# Altium PCB CL-KB-V1.2.pcbdoc (part 2 of 3)
Units mil, origin at the board's own origin, x right, y up, seen from the top; angles counter-clockwise.
Board outline 3269.95 x 5989.25 mil, 2 copper layers (Top Layer, Bottom Layer); 76 components, 86 nets, 398 pads, 855 vias.
Unrouted connection lines stored in the file: 1.
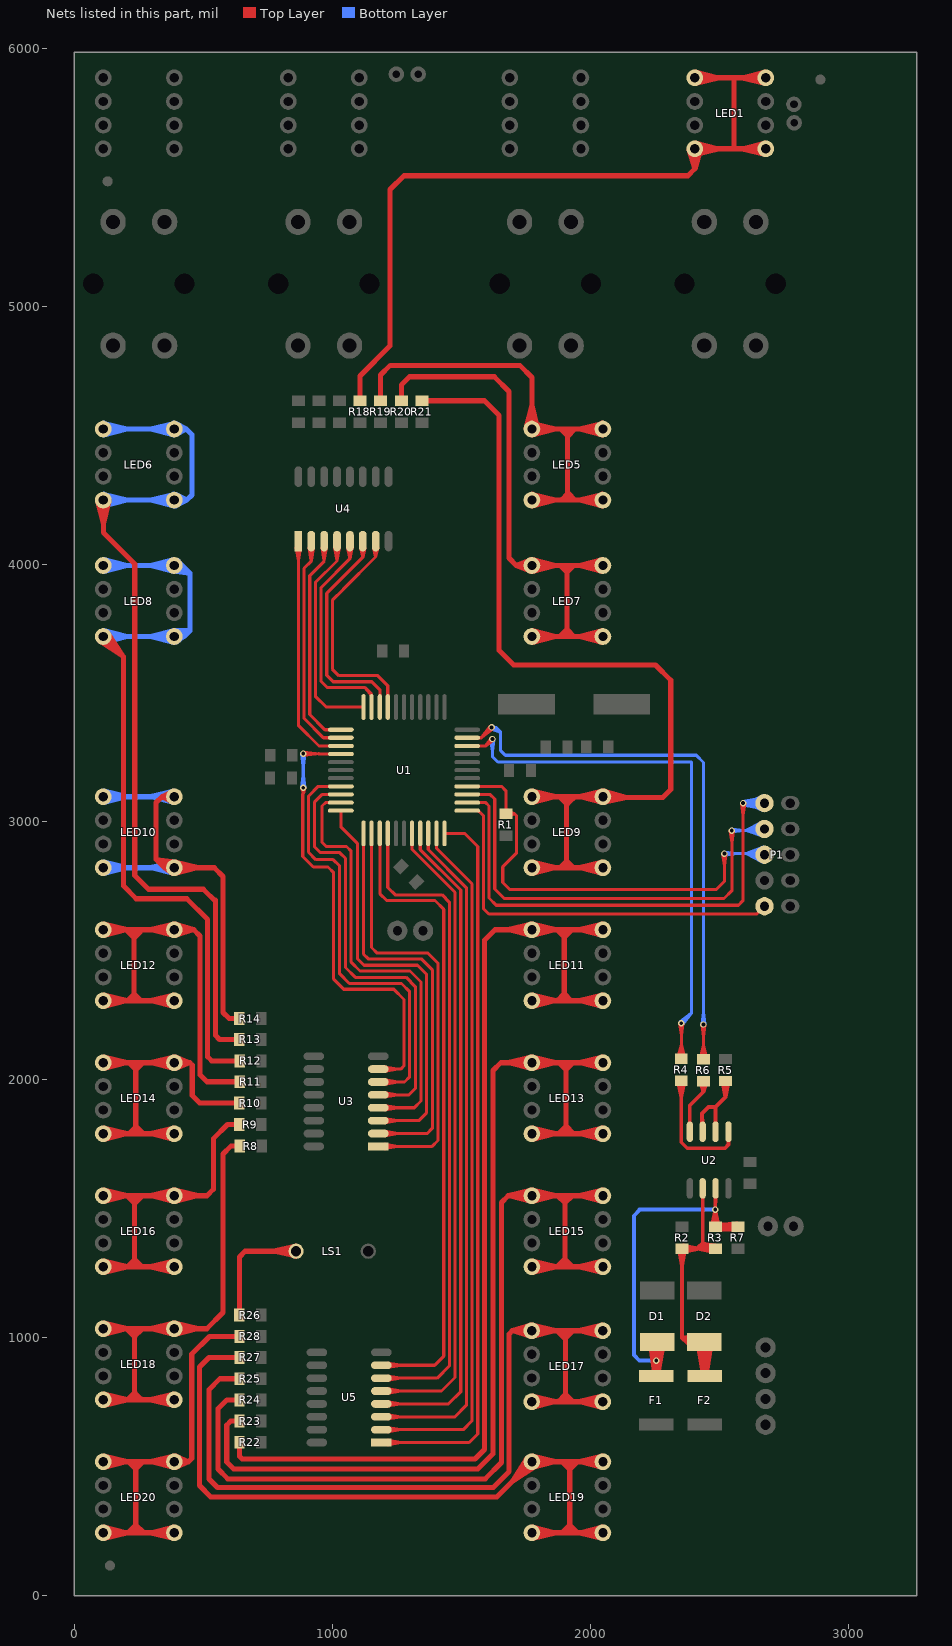
[diagram p2: the nets of this part, all layers, seen from the top]

## Via types
v1: diameter 25, hole 15, Top Layer to Bottom Layer, tented both sides, 855 vias

## Nets (pads, with @x,y where several pads share a name; then routed paths per layer and width w, separated by ;. In a path a pad name is that pad's centre, name@x,y a point inside that pad or via, vN(x,y) a via of type N, cw(c..) or ccw(c..) an arc to the next point about the centre after c; other vN are vias at no path point) (continued)
LEDK4: LED1.K R18.1 | length 4053.9
  Top Layer w20: R18.1@1106.15,4634.52 1106.15,4731.15 1223,4848 1223,5454 1277,5508 2379,5508 2405.48,5534.48 ; LED1.K@2383.22,5608.95 2405.48,5534.48 ; LED1.K@2405.48,5887.8 LED1.K@2681.07,5887.8 ; LED1.K@2408.22,5589.87 2497.98,5612.2 LED1.K@2408.22,5634.54 ; LED1.K@2408.22,5865.46 2497.98,5887.8 LED1.K@2408.22,5910.13 ; LED1.K@2427.74,5608.95 2405.48,5534.48 ; 2557,5612.2 2557,5887.8 ; LED1.K@2678.33,5589.87 2588.57,5612.2 ; LED1.K@2678.33,5634.54 2588.57,5612.2 ; LED1.K@2678.33,5865.46 2588.57,5887.8 LED1.K@2678.33,5910.13 ; 2405.48,5534.48 LED1.K@2405.48,5612.2 ; 2405.48,5534.48 LED1.K@2405.48,5612.2 ; LED1.K@2405.48,5612.2 LED1.K@2681.07,5612.2 2588.57,5612.2
LEDK5: LED5.K R19.1 | length 2998.3
  Top Layer w20: R19.1@1185.88,4634.52 1185.88,4734 1223.88,4772 1726,4772 1773.2,4724.8 LED5.K@1773.2,4524.8 LED5.K@2048.79,4524.8 1956.29,4524.8 ; LED5.K@1750.86,4527.54 1773.2,4617.3 LED5.K@1795.53,4527.54 ; LED5.K@1773.2,4249.21 LED5.K@2048.79,4249.21 1956.29,4249.21 ; LED5.K@1775.93,4226.88 1865.7,4249.21 LED5.K@1775.93,4271.54 ; LED5.K@1775.93,4502.47 1865.7,4524.8 LED5.K@1775.93,4547.14 ; 1886,4524.8 1911,4499.8 ; 1888.8,4250.21 1913.8,4275.21 ; 1912,4249.21 1912,4522.8 ; 1912.8,4498 1937.8,4523 ; 1914.8,4274.41 1939.8,4249.41 ; LED5.K@2046.05,4226.88 1956.29,4249.21 ; LED5.K@2046.05,4271.54 1956.29,4249.21 ; LED5.K@2046.05,4502.47 1956.29,4524.8 ; LED5.K@2046.05,4547.14 1956.29,4524.8
LEDK6: LED7.K R20.1 | length 3338.5
  Top Layer w20: R20.1@1266.58,4634.52 1266.58,4696 1298.58,4728 1627,4728 1684,4671 1684,4024 1712.72,3995.28 ; LED7.K@1769.01,3973.17 1712.72,3995.28 ; LED7.K@1769.01,4017.38 1712.72,3995.28 ; LED7.K@1773.2,3719.68 LED7.K@2048.79,3719.68 1956.29,3719.68 ; LED7.K@1773.2,3995.28 1712.72,3995.28 ; LED7.K@1775.93,3697.35 1865.7,3719.68 LED7.K@1775.93,3742.02 ; LED7.K@1775.93,3972.94 1865.7,3995.28 LED7.K@1775.93,4017.61 ; 1884,3994.8 1909,3969.8 ; 1884.2,3723 1909.2,3748 ; 1910,3719.68 1910,3995.28 ; 1910,3970 1935,3995 ; 1911,3745.2 1936,3720.2 ; LED7.K@2046.05,3697.35 1956.29,3719.68 ; LED7.K@2046.05,3742.02 1956.29,3719.68 ; LED7.K@2046.05,3972.94 1956.29,3995.28 ; LED7.K@2046.05,4017.61 1956.29,3995.28 ; 1712.72,3995.28 LED7.K@2048.79,3995.28 1956.29,3995.28
LEDK7: LED9.K R21.1 | length 4901.7
  Top Layer w20: R21.1@1346.31,4634.52 1589.48,4634.52 1646,4578 1646,3666 1703,3609 2253,3609 2312,3550 2312,3126 2281,3095 2051.82,3095 LED9.K@2048.79,3098.03 ; R21.1@1351.31,4634.52 1431.31,4634.52 ; LED9.K@1773.2,2822.44 LED9.K@2048.79,2822.44 1956.29,2822.44 ; LED9.K@1773.2,3098.03 LED9.K@2048.79,3098.03 ; LED9.K@1775.93,2800.11 1865.7,2822.44 LED9.K@1775.93,2844.77 ; LED9.K@1775.93,3075.7 1865.7,3098.03 LED9.K@1775.93,3120.36 ; 1882,3097.23 1907,3072.23 ; 1883.8,2823.44 1908.8,2848.44 ; 1908,2822.44 1908,3098.03 ; 1908.8,3067 1933.8,3092 ; 1909.8,2847.64 1934.8,2822.64 ; LED9.K@2046.05,2800.11 1956.29,2822.44 ; LED9.K@2046.05,2844.77 1956.29,2822.44 ; LED9.K@2046.05,3075.7 1956.29,3098.03 ; LED9.K@2046.05,3120.36 1956.29,3098.03 ; LED9.K@2050.79,3075.62 2141.4,3095 ; LED9.K@2052.25,3120.26 2141.4,3095 ; 1956.29,3098.03 LED9.K@2048.79,3098.03 ; LED9.K@2048.79,3098.03 2141.4,3095
LEDK8: LED18.K R8.1 | length 3022
  Top Layer w20: LED18.K@110.2,757.87 LED18.K@385.8,757.87 293.3,757.87 ; LED18.K@110.2,1033.46 511.46,1033.46 574,1096 574,1711 605,1742 ; LED18.K@112.94,735.54 202.7,757.87 LED18.K@112.94,780.21 ; LED18.K@112.94,1011.13 202.7,1033.46 LED18.K@112.94,1055.8 ; 205,1028.8 230,1003.8 ; 206.2,759.2 231.2,784.2 ; 229,1033.46 231,1031.46 231,757.87 ; 231.8,1004 256.8,1029 ; 232,785.2 257,760.2 ; LED18.K@383.06,735.54 293.3,757.87 ; LED18.K@383.06,780.21 293.3,757.87 ; LED18.K@383.06,1011.13 293.3,1033.46 ; LED18.K@383.06,1055.8 293.3,1033.46 ; LED18.K@385.8,1033.46 293.3,1033.46 ; LED18.K@388.53,1011.13 478.3,1033.46 LED18.K@388.53,1055.8 ; 605,1742 R8.1@640,1742 605,1742
LEDK9: LED16.K R9.1 | length 2607.3
  Top Layer w20: LED16.K@110.2,1274.02 LED16.K@385.8,1274.02 293.3,1274.02 ; LED16.K@110.2,1549.61 512,1549.61 537,1574.61 537,1771 591.54,1825.54 ; LED16.K@112.94,1251.68 202.7,1274.02 LED16.K@112.94,1296.35 ; LED16.K@112.94,1527.27 202.7,1549.61 LED16.K@112.94,1571.94 ; 205.8,1545.8 230.8,1520.8 ; 206.2,1276.2 231.2,1301.2 ; 227,1549.61 231,1545.61 231,1274.02 ; 231.8,1520 256.8,1545 ; 232,1302.2 257,1277.2 ; LED16.K@383.06,1251.68 293.3,1274.02 ; LED16.K@383.06,1296.35 293.3,1274.02 ; LED16.K@383.06,1527.27 293.3,1549.61 ; LED16.K@383.06,1571.94 293.3,1549.61 ; LED16.K@385.8,1549.61 293.3,1549.61 ; LED16.K@388.53,1527.27 478.3,1549.61 LED16.K@388.53,1571.94 ; 591.54,1825.54 R9.1@637.75,1825.54 591.54,1825.54
LEDK10: LED14.K R10.1 | length 2476.4
  Top Layer w20: LED14.K@110.2,1790.16 LED14.K@385.8,1790.16 293.3,1790.16 ; LED14.K@110.2,2065.75 445.25,2065.75 ; LED14.K@112.94,1767.82 202.7,1790.16 LED14.K@112.94,1812.49 ; LED14.K@112.94,2043.41 202.7,2065.75 LED14.K@112.94,2088.08 ; 210,2065.8 235,2040.8 ; 211.2,1792.2 236.2,1817.2 ; 236,1792.16 236,2065.75 ; 236.8,2039 261.8,2064 ; 237,1818.2 262,1793.2 ; LED14.K@383.06,1767.82 293.3,1790.16 ; LED14.K@383.06,1812.49 293.3,1790.16 ; LED14.K@383.06,2043.41 293.3,2065.75 ; LED14.K@383.06,2088.08 293.3,2065.75 ; LED14.K@385.8,2065.75 293.3,2065.75 ; LED14.K@390.05,2043.65 445.25,2065.75 ; LED14.K@390.05,2087.84 445.25,2065.75 ; 558,1909 R10.1@638,1909 484,1909 455,1938 455,2056 445.25,2065.75
LEDK11: LED12.K R11.1 | length 2934.1
  Top Layer w20: LED12.K@110.2,2306.3 LED12.K@385.8,2306.3 293.3,2306.3 ; LED12.K@110.2,2581.89 461.11,2581.89 ; LED12.K@112.94,2283.97 202.7,2306.3 LED12.K@112.94,2328.63 ; LED12.K@112.94,2559.56 202.7,2581.89 LED12.K@112.94,2604.22 ; 203.8,2575.8 228.8,2550.8 ; 204.2,2306.2 229.2,2331.2 ; 229,2306.3 229,2578.89 ; 229.8,2550 254.8,2575 ; 230,2332.2 255,2307.2 ; LED12.K@383.06,2283.97 293.3,2306.3 ; LED12.K@383.06,2328.63 293.3,2306.3 ; LED12.K@383.06,2559.56 293.3,2581.89 ; LED12.K@383.06,2604.22 293.3,2581.89 ; LED12.K@385.8,2581.89 293.3,2581.89 ; LED12.K@389.16,2559.64 461.11,2581.89 ; LED12.K@389.16,2604.14 461.11,2581.89 ; 559,1992 R11.1@639,1992 512,1992 485,2019 485,2558 461.11,2581.89
LEDK12: LED8.K R12.1 | length 4761.3
  Top Layer w20: LED8.K@96.07,3702.18 185.13,3644.76 LED8.K@127.71,3733.82 ; LED8.K@110.2,3719.68 189,3640.89 189,2751 238,2702 434,2702 515,2621 515,2089 531,2073 R12.1@639,2073 559,2073
  Bottom Layer w20: LED8.K@110.2,3719.68 423.68,3719.68 ; LED8.K@110.2,3995.28 415.72,3995.28 446,3965 ; LED8.K@112.94,3697.35 202.7,3719.68 LED8.K@112.94,3742.02 ; LED8.K@112.94,3972.94 202.7,3995.28 LED8.K@112.94,4017.61 ; LED8.K@379.18,3973.77 446,3965 ; LED8.K@381.79,3741.83 446,3742 ; LED8.K@383.06,3697.35 293.3,3719.68 ; LED8.K@383.06,3742.02 293.3,3719.68 ; LED8.K@383.06,3972.94 293.3,3995.28 ; LED8.K@383.06,4017.61 293.3,3995.28 ; LED8.K@397.19,3700.28 446,3742 ; LED8.K@399.12,4013.41 446,3965 ; 293.3,3719.68 LED8.K@385.8,3719.68 ; 293.3,3995.28 LED8.K@385.8,3995.28 446,3965 ; LED8.K@385.8,3719.68 423.68,3719.68 ; LED8.K@385.8,3719.68 446,3742 ; 423.68,3719.68 392.48,3698.2 423.68,3719.68 ; 423.68,3719.68 392.48,3741.17 423.68,3719.68 ; 423.68,3719.68 446,3742 ; 446,3742 446,3965
LEDK13: LED6.K R13.1 | length 4893.7
  Top Layer w20: LED6.K@87.87,4246.48 110.2,4156.71 ; LED6.K@132.54,4246.48 110.2,4156.71 ; 545,2692 498,2739 285,2739 232,2792 232,4001 110.2,4122.8 LED6.K@110.2,4249.21 110.2,4156.71 ; 545,2696 545,2172 561,2156 ; 561,2156 R13.1@638,2156 561,2156
  Bottom Layer w20: LED6.K@110.2,4249.21 434.21,4249.21 ; LED6.K@110.2,4524.8 432.2,4524.8 ; LED6.K@112.94,4226.88 202.7,4249.21 LED6.K@112.94,4271.54 ; LED6.K@112.94,4502.47 202.7,4524.8 LED6.K@112.94,4547.14 ; LED6.K@383.06,4226.88 293.3,4249.21 ; LED6.K@383.06,4271.54 293.3,4249.21 ; LED6.K@383.06,4502.47 293.3,4524.8 ; LED6.K@383.06,4547.14 293.3,4524.8 ; LED6.K@385.8,4249.21 293.3,4249.21 ; LED6.K@385.8,4524.8 293.3,4524.8 ; LED6.K@391.02,4227.33 434.21,4249.21 ; LED6.K@391.02,4271.1 434.21,4249.21 ; LED6.K@391.25,4502.97 432.2,4524.8 ; LED6.K@391.25,4546.63 432.2,4524.8 ; 432.2,4524.8 454,4503 454,4269 434.21,4249.21
LEDK14: LED10.K R14.1 | length 3494.7
  Top Layer w20: LED10.K@373.54,2803.57 315,2855 ; LED10.K@380.5,3076.16 338.03,3098.03 ; LED10.K@380.5,3119.9 338.03,3098.03 ; LED10.K@388.53,2800.11 478.3,2822.44 LED10.K@388.53,2844.77 ; LED10.K@392.15,2844.03 315,2855 ; 315,2855 LED10.K@385.8,2822.44 ; 315,2855 347.56,2822.44 ; 315,2855 315,3075 338.03,3098.03 ; 338.03,3098.03 LED10.K@385.8,3098.03 338.03,3098.03 ; 347.56,2822.44 LED10.K@385.8,2822.44 ; 347.56,2822.44 379.18,2843.94 347.56,2822.44 ; 347.56,2822.44 379.18,2800.94 347.56,2822.44 ; 347.56,2822.44 LED10.K@385.8,2822.44 ; 347.56,2822.44 540.56,2822.44 575,2788 575,2261 599,2237 ; 599,2237 R14.1@638,2237 599,2237
  Bottom Layer w20: LED10.K@110.2,2822.44 LED10.K@385.8,2822.44 293.3,2822.44 ; LED10.K@110.2,3098.03 LED10.K@385.8,3098.03 293.3,3098.03 ; LED10.K@112.94,2800.11 202.7,2822.44 LED10.K@112.94,2844.77 ; LED10.K@112.94,3075.7 202.7,3098.03 LED10.K@112.94,3120.36 ; LED10.K@383.06,2800.11 293.3,2822.44 ; LED10.K@383.06,2844.77 293.3,2822.44 ; LED10.K@383.06,3075.7 293.3,3098.03 ; LED10.K@383.06,3120.36 293.3,3098.03
LEDK15: LED11.K R22.1 | length 5421.4
  Top Layer w20: R22.1@638.45,588.17 638.45,538.55 ; R22.1@638.45,593.17 638.45,538.55 ; LED11.K@1770.43,2559.56 1680.7,2582 ; LED11.K@1770.49,2604.23 1680.7,2582 ; LED11.K@1773.2,2306.3 LED11.K@2048.79,2306.3 1956.29,2306.3 ; LED11.K@1775.93,2283.97 1865.7,2306.3 LED11.K@1775.93,2328.63 ; LED11.K@1775.93,2559.56 1865.7,2581.89 LED11.K@1775.93,2604.22 ; 1873,2580.8 1898,2555.8 ; 1873.2,2308 1898.2,2333 ; 1899,2307.3 1899,2581.89 ; 1899.2,2332.2 1924.2,2307.2 ; 1899.8,2554 1924.8,2579 ; LED11.K@2046.05,2283.97 1956.29,2306.3 ; LED11.K@2046.05,2328.63 1956.29,2306.3 ; LED11.K@2046.05,2559.56 1956.29,2581.89 ; LED11.K@2046.05,2604.22 1956.29,2581.89 ; 638.45,538.55 649,528 1552,528 1589,565 1589,2541 1630,2582 1773.09,2582 LED11.K@1773.2,2581.89 ; 1680.7,2582 LED11.K@1773.2,2581.89 ; LED11.K@1773.2,2581.89 LED11.K@2048.79,2581.89 1956.29,2581.89
LEDK16: LED13.K R23.1 | length 5120.9
  Top Layer w20: LED13.K@1770.46,2043.41 1680.7,2065.75 ; LED13.K@1770.46,2088.08 1680.7,2065.75 ; LED13.K@1773.2,1790.16 LED13.K@2048.79,1790.16 1956.29,1790.16 ; LED13.K@1773.2,2065.75 1680.7,2065.75 ; LED13.K@1775.93,1767.82 1865.7,1790.16 LED13.K@1775.93,1812.49 ; LED13.K@1775.93,2043.41 1865.7,2065.75 LED13.K@1775.93,2088.08 ; 1880,2064.8 1905,2039.8 ; 1880.2,1793 1905.2,1818 ; 1906,1792.16 1906,2065.75 ; 1906.8,2039 1931.8,2064 ; 1907,1818.2 1932,1793.2 ; LED13.K@2046.05,1767.82 1956.29,1790.16 ; LED13.K@2046.05,1812.49 1956.29,1790.16 ; LED13.K@2046.05,2043.41 1956.29,2065.75 ; LED13.K@2046.05,2088.08 1956.29,2065.75 ; 604.87,674.87 R23.1@638.45,674.87 604.87,674.87 ; 604.87,674.87 589,659 589,516 616,489 1563,489 1622,548 1622,2035 1652.75,2065.75 LED13.K@2048.79,2065.75 1956.29,2065.75
LEDK17: LED15.K R24.1 | length 4826.7
  Top Layer w20: LED15.K@1770.43,1527.28 1681.61,1549.61 ; LED15.K@1770.43,1571.94 1681.61,1549.61 ; LED15.K@1773.2,1274.02 LED15.K@2048.79,1274.02 1956.29,1274.02 ; LED15.K@1773.2,1549.61 1681.61,1549.61 ; LED15.K@1775.93,1251.68 1865.7,1274.02 LED15.K@1775.93,1296.35 ; LED15.K@1775.93,1527.27 1865.7,1549.61 LED15.K@1775.93,1571.94 ; 1876.2,1279 1901.2,1304 ; 1877,1547 1902,1522 1927,1547 ; 1902,1276.02 1902,1549.61 ; 1902.2,1303.2 1927.2,1278.2 ; LED15.K@2046.05,1251.68 1956.29,1274.02 ; LED15.K@2046.05,1296.35 1956.29,1274.02 ; LED15.K@2046.05,1527.27 1956.29,1549.61 ; LED15.K@2046.05,1571.94 1956.29,1549.61 ; 589.54,757.55 R24.1@638.45,757.55 589.54,757.55 ; 589.54,757.55 555,723 555,489 593,451 1592,451 1655,514 1655,1523 1681.61,1549.61 ; 1681.61,1549.61 LED15.K@2048.79,1549.61 1956.29,1549.61
LEDK18: LED17.K R25.1 | length 4507.5
  Top Layer w20: LED17.K@1768.83,1003.55 1697.2,1025.8 ; LED17.K@1768.83,1048.04 1697.2,1025.8 ; LED17.K@1772.2,750.2 LED17.K@2047.8,750.2 1955.3,750.2 ; LED17.K@1772.2,1025.8 1697.2,1025.8 ; LED17.K@1774.94,727.87 1864.7,750.2 LED17.K@1774.94,772.54 ; LED17.K@1774.94,1003.46 1864.7,1025.8 LED17.K@1774.94,1048.13 ; 1877,1019.8 1902,994.8 ; 1877.2,752 1902.2,777 ; 1902.8,995.8 1927.8,1020.8 ; 1903,751.2 1903,1025.8 ; 1904,778.2 1929,753.2 ; LED17.K@2045.06,727.87 1955.3,750.2 ; LED17.K@2045.06,772.54 1955.3,750.2 ; LED17.K@2045.06,1003.46 1955.3,1025.8 ; LED17.K@2045.06,1048.13 1955.3,1025.8 ; 562.24,839.24 R25.1@638.45,839.24 562.24,839.24 ; 562.24,839.24 520,797 520,450 553,417 1623,417 1685,479 1685,1013.59 1697.2,1025.8 ; 1697.2,1025.8 LED17.K@2047.8,1025.8 1955.3,1025.8
LEDK19: LED19.K R27.1 | length 4286.7
  Top Layer w20: 558.45,921.92 R27.1@638.45,921.92 520,921.92 483,884.92 483,425 527,381 1636.87,381 LED19.K@1773.2,517.32 ; LED19.K@1755.69,531.45 1698.27,442.4 ; LED19.K@1773.2,241.73 LED19.K@2048.79,241.73 1956.29,241.73 ; LED19.K@1775.93,219.4 1865.7,241.73 LED19.K@1775.93,264.06 ; LED19.K@1775.93,494.99 1865.7,517.32 LED19.K@1775.93,539.66 ; LED19.K@1787.33,499.81 1698.27,442.4 ; 1894,513.8 1919,488.8 ; 1894.2,245 1919.2,270 ; 1920,241.73 1920,517.32 ; 1920.8,489 1945.8,514 ; 1921,270.2 1946,245.2 ; LED19.K@2046.05,219.4 1956.29,241.73 ; LED19.K@2046.05,264.06 1956.29,241.73 ; LED19.K@2046.05,494.99 1956.29,517.32 ; LED19.K@2046.05,539.66 1956.29,517.32 ; 1698.27,442.4 LED19.K@1773.2,517.32 ; LED19.K@1773.2,517.32 LED19.K@2048.79,517.32 1956.29,517.32
LEDK20: LED20.K R28.1 | length 2774
  Top Layer w20: LED20.K@110.2,241.73 LED20.K@385.8,241.73 293.3,241.73 ; LED20.K@110.2,517.32 440.32,517.32 ; LED20.K@112.94,219.4 202.7,241.73 LED20.K@112.94,264.06 ; LED20.K@112.94,494.99 202.7,517.32 LED20.K@112.94,539.66 ; 210,515.8 235,490.8 ; 210.2,246 235.2,271 ; 236,241.73 236,516.32 237,517.32 ; 236.8,491 261.8,516 ; 237,271.2 262,246.2 ; LED20.K@383.06,219.4 293.3,241.73 ; LED20.K@383.06,264.06 293.3,241.73 ; LED20.K@383.06,494.99 293.3,517.32 ; LED20.K@383.06,539.66 293.3,517.32 ; LED20.K@385.8,517.32 293.3,517.32 ; LED20.K@390.44,495.31 440.32,517.32 ; LED20.K@390.44,539.34 440.32,517.32 ; 558.45,1003.61 R28.1@638.45,1003.61 521.61,1003.61 453,935 453,530 440.32,517.32
LOUT1: U1.35 U3.1 | length 1863.8
  Top Layer w12: 1151,2870 U1.35@1151,2914 ; U1.35@1151,2967 1151,2513 1173,2491 1370,2491 1409,2452 1409,1764 1386,1741 U3.1@1177,1741 ; U3.1@1202,1741 1253,1741 ; U3.1@1202.79,1732.04 1253,1741 ; U3.1@1202.79,1749.96 1253,1741
LOUT2: U1.34 U3.2 | length 1791.6
  Top Layer w12: 1120,2870 U1.34@1120,2914 ; U1.34@1120,2956 1120,2487 1138,2469 1344,2469 1387,2426 1387,1811 1367,1791 U3.2@1177,1791 ; U3.2@1202,1791 1253,1791 ; U3.2@1202.79,1782.04 1253,1791 ; U3.2@1202.79,1799.96 1253,1791
LOUT3: U1.33 U3.3 | length 1829
  Top Layer w12: 1032,3000 U1.33@1032,3044 1032,2981 1096,2917 1096,2470 1122,2444 1329,2444 1365,2408 1365,1872 1334,1841 U3.3@1177,1841 ; U3.3@1202,1841 1253,1841 ; U3.3@1202.79,1832.04 1253,1841 ; U3.3@1202.79,1849.96 1253,1841
LOUT4: U1.32 U3.4 | length 1890.1
  Top Layer w12: U1.32@990,3075 972,3075 ; U1.32@1032,3075 972,3075 ; U3.4@1177,1891 1317,1891 1343,1917 1343,2379 1300,2422 1106,2422 1072,2456 1072,2887 1054,2905 975,2905 959,2921 959,3062 972,3075 ; U3.4@1202,1891 1253,1891 ; U3.4@1202.79,1882.04 1253,1891 ; U3.4@1202.79,1899.96 1253,1891
LOUT5: U1.31 U3.5 | length 1884.9
  Top Layer w12: U1.31@990,3107 960,3107 ; U1.31@1032,3107 960,3107 ; U3.5@1177,1941 1296,1941 1321,1966 1321,2361 1285,2397 1088,2397 1050,2435 1050,2859 1028,2881 953,2881 929,2905 929,3076 960,3107 ; U3.5@1202,1941 1253,1941 ; U3.5@1202.79,1932.04 1253,1941 ; U3.5@1202.79,1949.96 1253,1941
LOUT6: U1.30 U3.6 | length 1878.4
  Top Layer w12: 946,3138 U1.30@990,3138 ; U1.30@1032,3138 944,3138 906,3100 906,2883 935,2854 1002,2854 1027,2829 1027,2411 1065,2373 1267,2373 1299,2341 1299,2011 1279,1991 U3.6@1177,1991 ; U3.6@1202,1991 1253,1991 ; U3.6@1202.79,1982.04 1253,1991 ; U3.6@1202.79,1999.96 1253,1991
LOUT7: U1.26 U3.7 | length 2375.2
  Top Layer w12: v1@879.57,3132.03 886,3111.11 ; v1(886,3265) U1.26@1032,3264 ; v1@886.39,3258.51 934.5,3264.67 v1@886.48,3271.48 ; v1@892.43,3132.03 886,3111.11 ; 946,3264.59 U1.26@990,3264 ; U3.7@1177,2041 1264,2041 1277,2054 1277,2311 1237,2351 1043,2351 1004,2390 1004,2803 982,2825 925,2825 884,2866 884,3109.11 886,3111.11 ; U3.7@1202,2041 1253,2041 ; U3.7@1202.79,2032.04 1253,2041 ; U3.7@1202.79,2049.96 1253,2041 ; 886,3111.11 v1(886,3133) 886,3111.11
  Bottom Layer w12: v1@879.51,3133.44 886,3181.5 v1@892.49,3133.44 ; v1@879.51,3264.56 886,3216.5 ; v1(886,3133) v1(886,3265) 886,3216.5 ; v1@892.49,3264.56 886,3216.5
LOUT8: U1.25 U4.1 | length 1109
  Top Layer w12: U4.1@858.04,4064.21 867,4014 ; U4.1@867,4065 867,4014 ; U4.1@867,4090 867,3375.11 947.11,3295 ; U4.1@875.96,4064.21 867,4014 ; U1.25@990,3295 947.11,3295 ; U1.25@1032,3295 947.11,3295
LOUT9: U1.24 U4.2 | length 1052.5
  Top Layer w12: U4.2@908.04,4064.21 917,4014 ; U4.2@917,4065 917,4014 ; U4.2@917,4090 917,4012 889,3984 889,3402.11 964.11,3327 ; U4.2@925.96,4064.21 917,4014 ; U1.24@990,3327 964.11,3327 ; U1.24@1032,3327 964.11,3327
LOUT10: U1.23 U4.3 | length 1021.6
  Top Layer w12: U4.3@958.04,4064.21 967,4014 ; U4.3@967,4065 967,4014 ; U4.3@967,4097 967,4012 911,3956 911,3417 970,3358 ; U4.3@975.96,4064.21 967,4014 ; U1.23@990,3358 970,3358 ; U1.23@1032,3358 970,3358
LOUT11: U1.22 U4.4 | length 1038.2
  Top Layer w12: U4.4@1008.04,4064.21 1017,4014 ; U4.4@1017,4065 1017,4014 ; U4.4@1017,4090 1017,4013 933,3929 933,3488 975,3446 U1.22@1120,3446 1076,3446 ; U4.4@1025.96,4064.21 1017,4014
LOUT12: U1.21 U4.5 | length 1048
  Top Layer w12: U4.5@1058.05,4064.08 1067,4021 ; U4.5@1067,4065 1067,4021 ; U4.5@1067,4090 1067,4021 ; U4.5@1075.95,4064.08 1067,4021 ; 1127.34,3520.66 U1.21@1151,3488 ; U1.21@1151,3446 1151,3497 ; 1067,4021 955,3909 955,3546 979,3522 1126,3522 1151,3497 ; U1.21@1151,3488 1151,3497 ; U1.21@1151,3488 1151,3497
LOUT13: U1.20 U4.6 | length 1025.2
  Top Layer w12: U4.6@1108.06,4063.93 1117,4027 ; U4.6@1117,4065 1117,4027 ; U4.6@1117,4101 1117,4027 ; U4.6@1125.94,4063.93 1117,4027 ; U1.20@1183,3446 1183,3513 ; U1.20@1183,3488 1183,3513 ; 1117,4027 977,3887 977,3569 1002,3544 1152,3544 1183,3513
LOUT14: U1.19 U4.7 | length 1042.7
  Top Layer w12: U4.7@1158.04,4064.15 1166,4028 ; U4.7@1166,4089 1166,4028 ; U4.7@1167,4065 1166,4028 ; U4.7@1167,4089 U4.7@1167,4090 ; U4.7@1175.9,4063.66 1166,4028 ; U1.19@1214,3446 1214,3529 ; U1.19@1214,3488 1214,3529 ; 1166,4028 1043,3905 1043,3904 999,3860 999,3593 1024,3568 1175,3568 1214,3529
LOUT15: U1.44 U5.1 | length 2970.9
  Top Layer w12: U5.1@1188.98,591.73 1529.73,591.73 1563,625 1563,2905 1512,2956 U1.44@1434,2956 ; U5.1@1213.98,591.73 1264.98,591.73 ; U5.1@1214.77,582.77 1264.98,591.73 ; U5.1@1214.77,600.7 1264.98,591.73
LOUT16: U1.43 U5.2 | length 2872.4
  Top Layer w12: U5.2@1188.98,641.73 1506.73,641.73 1541,676 1541,2760 1403,2898 ; U5.2@1213.98,641.73 1264.98,641.73 ; U5.2@1214.77,632.77 1264.98,641.73 ; U5.2@1214.77,650.7 1264.98,641.73 ; U1.43@1403,2914 1403,2898 ; U1.43@1403,2956 1403,2898
LOUT17: U1.42 U5.3 | length 2803.7
  Top Layer w12: U5.3@1188.98,691.73 1474.73,691.73 1519,736 1519,2744.96 1371,2892.96 ; U5.3@1213.98,691.73 1264.98,691.73 ; U5.3@1214.77,682.77 1264.98,691.73 ; U5.3@1214.77,700.7 1264.98,691.73 ; U1.42@1371,2914 1371,2892.96 ; U1.42@1371,2956 1371,2892.96
LOUT18: U1.41 U5.4 | length 2733.8
  Top Layer w12: U5.4@1188.98,741.73 1449.73,741.73 1497,789 1497,2735.85 1340,2892.85 ; U5.4@1213.98,741.73 1264.98,741.73 ; U5.4@1214.77,732.77 1264.98,741.73 ; U5.4@1214.77,750.7 1264.98,741.73 ; U1.41@1340,2914 1340,2892.85 ; U1.41@1340,2956 1340,2892.85
LOUT19: U1.40 U5.5 | length 2662.1
  Top Layer w12: U5.5@1188.98,791.73 1422.73,791.73 1475,844 1475,2726.73 1308,2893.73 ; U5.5@1213.98,791.73 1264.98,791.73 ; U5.5@1214.77,782.77 1264.98,791.73 ; U5.5@1214.77,800.7 1264.98,791.73 ; U1.40@1308,2914 1308,2893.73 ; U1.40@1308,2956 1308,2893.73
LOUT20: U1.37 U5.6 | length 2753.2
  Top Layer w12: U5.6@1188.98,841.73 1405.73,841.73 1453,889 1453,2689 1425,2717 1243,2717 1214,2746 U1.37@1214,2956 ; U5.6@1213.98,841.73 1264.98,841.73 ; 1214,2870 U1.37@1214,2914 ; U5.6@1214.77,832.77 1264.98,841.73 ; U5.6@1214.77,850.7 1264.98,841.73
LOUT21: U1.36 U5.7 | length 2704.9
  Top Layer w12: U1.36@1182,2956 U1.36@1182,2966 ; 1183,2870 U1.36@1183,2914 ; U1.36@1183,2956 1183,2722 1210,2695 1397,2695 1431,2661 1431,927 1395.73,891.73 U5.7@1188.98,891.73 ; U5.7@1213.98,891.73 1264.98,891.73 ; U5.7@1214.77,882.77 1264.98,891.73 ; U5.7@1214.77,900.7 1264.98,891.73
MISO: P1.9 U1.2 | length 3297.6
  Top Layer w12: U1.2@1522,3075 1594,3075 ; U1.2@1564,3075 1594,3075 ; v1@2586.51,3072.7 2592,3024.46 ; v1@2592,3072 2592,2694 2575,2677 1635,2677 1607,2705 1607,3062 1594,3075 ; v1(2593,3073) 2592,3024.46 ; v1@2599.48,3072.43 2592,3024.46
  Bottom Layer w12: v1@2591.32,3066.72 2641.88,3056.56 ; v1@2591.32,3079.28 2641.88,3089.44 ; v1@2592.2,3066.55 P1.9@2642.24,3063.59 ; v1@2592.2,3079.45 P1.9@2642.24,3082.41 ; v1@2594.63,3066.71 P1.9@2642.24,3082.41 ; v1@2594.63,3079.29 P1.9@2642.24,3063.59 ; v1@2595.46,3066.98 2641.88,3089.44 ; v1@2595.46,3079.02 2641.88,3056.56 ; P1.9@2669.94,3044.2 v1@2604.57,3073 ; P1.9@2669.94,3101.8 v1@2604.57,3073 ; P1.9@2673.87,3055.7 v1@2604.57,3073 ; P1.9@2673.87,3090.3 v1@2604.57,3073 ; v1(2593,3073) P1.9@2642.24,3063.59 ; v1(2593,3073) 2641.88,3056.56 ; v1(2593,3073) P1.9@2641.5,3073 ; v1(2593,3073) P1.9@2642.24,3082.41 ; v1(2593,3073) 2641.88,3089.44 ; v1(2593,3073) P1.9@2676,3073 v1@2604.57,3073 ; P1.9@2641.5,3073 2593.44,3066.51 P1.9@2641.5,3073 ; P1.9@2641.5,3073 2593.44,3079.49 P1.9@2641.5,3073
MOSI: P1.1 U1.1 | length 1572.3
  Top Layer w12: U1.1@1522,3044 1566,3044 1585,3025 ; U1.1@1564,3044 1585,3025 ; P1.1@2676,2673 2646,2643 1606,2643 1585,2664 1585,3025
NetD1_K: D1.K F1.2 R3.1 R7.2 U2.7 | length 4331.8
  Top Layer w15: R3.1@2472.56,1430.2 2485,1494 R3.1@2497.44,1430.2 ; R3.1@2474.33,1439.27 v1(2485,1496) ; R3.1@2485,1438.5 v1(2485,1496) ; v1@2485,1492.99 2486,1550 v1(2485,1496) ; U2.7@2486,1578 2485,1577 R3.1@2485,1429 R7.2@2573,1429 ; R3.1@2490,1429 R7.2@2555,1429 ; R3.1@2491.2,1416.56 R7.2@2555,1429 ; R3.1@2491.2,1441.44 R7.2@2555,1429 ; R3.1@2495.67,1439.27 v1(2485,1496) ; R7.2@2564.91,1416.89 R3.1@2503.01,1439.14 ; R7.2@2564.91,1441.11 R3.1@2503.01,1418.86 ; R7.2@2568.74,1416.52 R3.1@2503.01,1418.86 ; R7.2@2568.74,1441.48 R3.1@2503.01,1439.14 ; R3.1@2503.01,1418.86 R7.2@2568,1429 ; R3.1@2503,1429 R7.2@2568,1429 ; R3.1@2503,1429 2566.8,1441.44 R3.1@2503,1429 ; R3.1@2503,1429 2566.8,1416.56 R3.1@2503,1429 ; R3.1@2503,1429 R7.2@2568,1429 ; R3.1@2503.01,1439.14 R7.2@2568,1429
  Top Layer w30: D1.K@2255.94,971.94 F1.2@2255.94,850.45 ; F1.2@2255.94,850.45 v1(2255.94,910) ; F1.2@2255.94,850.45 v1(2255.94,910) ; F1.2@2255.94,850.45 v1(2255.94,910) ; F1.2@2255.94,850.45 v1(2255.94,910) ; F1.2@2255.94,850.45 2258.57,964.05 v1(2255.94,910) ; F1.2@2255.94,850.45 2241.39,963.35 v1(2255.94,910) ; F1.2@2255.94,850.45 2275.73,962.74 v1(2255.94,910) ; F1.2@2255.94,856.65 v1(2255.94,910) ; F1.2@2255.94,856.65 v1(2255.94,910) ; F1.2@2255.94,856.65 v1(2255.94,910) ; F1.2@2255.94,856.65 D1.K@2259,981.75 v1(2255.94,910) ; F1.2@2255.94,856.65 2239.03,980.64 v1(2255.94,910) ; F1.2@2255.94,856.65 2278.89,979.66 v1(2255.94,910)
  Bottom Layer w15: 2190,1496 v1(2485,1496) 2427.5,1496 ; 2193,1496 2169,1472 2169,931 2190,910 v1(2255.94,910) 2198.44,910
NetD2_K: D2.K F2.2 R2.2 R3.2 U2.6 | length 3246.7
  Top Layer w15: R2.2@2343.56,1342.8 2356,1279 ; R2.2@2361,1344 2426,1344 ; R2.2@2362.2,1331.56 2426,1344 ; R2.2@2362.2,1356.44 2426,1344 ; R2.2@2368.44,1342.8 2356,1279 ; D2.K@2397.16,958.01 2356,998 ; D2.K@2406.22,970.22 2356,998 ; D2.K@2412.28,1009.22 2356,998 ; D2.K@2413.25,994.05 2356,998 ; 2418,1348 2436,1366 ; 2436,1345 U2.6@2436,1578 ; 2436,1493 U2.6@2436,1550 ; D2.K@2442.97,981.75 2372.25,981.75 ; R3.2@2473.33,1333.43 2435,1365 ; R3.2@2475.8,1332.23 2453,1347 ; R3.2@2478.49,1356.41 2453,1347 ; R3.2@2478.8,1331.56 2415,1344 ; R3.2@2478.8,1356.44 2415,1344 ; R3.2@2483.82,1355.9 2435,1365 ; R3.2@2485,1344 R2.2@2356,1344 ; 2356,998 D2.K@2411.04,981.75 ; 2356,998 2372.25,981.75 ; 2356,998 R2.2@2356,1344 ; 2356,1279 R2.2@2356,1344 ; 2372.25,981.75 D2.K@2411.04,981.75 ; 2372.25,981.75 2409.03,994.08 2372.25,981.75 ; 2372.25,981.75 2409.03,969.41 2372.25,981.75 ; 2372.25,981.75 2401.29,1007.46 2372.25,981.75 ; 2372.25,981.75 2401.29,956.03 2372.25,981.75 ; 2372.25,981.75 D2.K@2411.04,981.75 ; 2415,1344 R3.2@2480,1344 ; 2435,1365 R3.2@2480,1344 ; 2435,1365 2453,1347 ; 2453,1347 R3.2@2480,1344
  Top Layer w30: D2.K@2423.05,979.99 F2.2@2443.95,856.74 ; D2.K@2425.93,962.97 F2.2@2443.95,850.45 ; D2.K@2442.97,981.75 F2.2@2443.95,856.74 ; D2.K@2443.11,964.07 F2.2@2443.95,850.45 ; D2.K@2443.95,980.76 F2.2@2443.95,850.45 ; D2.K@2460.29,963.16 F2.2@2443.95,850.45 ; D2.K@2462.92,980.31 F2.2@2443.95,856.74
NetLS1_2: LS1.2 R26.2 | length 803.8
  Top Layer w20: R26.2@638.09,1086.29 638.09,1312.09 660.33,1334.33 LS1.2@858.26,1334.33 768.73,1334.33 ; R26.2@638.09,1091.29 638.09,1171.29 ; LS1.2@856.13,1314.92 768.73,1334.33 ; LS1.2@856.13,1353.74 768.73,1334.33
NetR4_1: R4.1 U2.1 | length 704.3
  Top Layer w15: R4.1@2340.56,1994.8 2353,1931 ; R4.1@2365.44,1994.8 2353,1931 ; U2.1@2536,1770 2536,1748 ; U2.1@2536,1798 2536,1748 ; 2353,1931 R4.1@2353,1996 2353,1757 2376,1734 2522,1734 2536,1748
NetR5_1: R5.1 U2.2 U2.3 | length 601.3
  Top Layer w12: R5.1@2525,1995 R5.1@2529,1991
  Top Layer w15: U2.3@2433,1836 2433,1869 ; U2.3@2436,1826 2433,1869 ; U2.2@2486,1798 2486,1894 ; U2.2@2486,1826 2486,1883 ; R5.1@2512.56,1993.74 2525,1933 ; R5.1@2537.44,1993.74 2525,1933 ; 2433,1869 2458,1894 2486,1894 ; 2486,1894 2525,1933 ; 2525,1933 R5.1@2525,1995 2525,1933
NetR6_1: R6.1 U2.4 | length 398
  Top Layer w15: U2.4@2386,1798 2386,1900 2439,1953 ; U2.4@2386,1826 2386,1883 ; R6.1@2426.65,1992.09 2439,1953 ; R6.1@2451.35,1992.09 2439,1953 ; 2439,1953 R6.1@2439,1994 2439,1953
RST: P1.5 R1.1 U1.4 | length 2450.8
  Top Layer w12: U1.4@1522,3138 1655,3138 1672,3121 R1.1@1672,3032 1705,3032 ; U1.4@1564,3138 1608,3138 ; R1.1@1677,3032 1705,3032 ; R1.1@1680.5,3018.44 1705,3032 ; R1.1@1680.5,3045.56 1705,3032 ; v1@2513.51,2876.56 2520,2828.5 ; v1@2526.49,2876.56 2520,2828.5 ; 1705,3032 1714,3023 1714,2880 1660,2826 1660,2765 1687,2738 2489,2738 2520,2769 v1(2520,2877) 2520,2828.5
  Bottom Layer w12: v1(2520,2877) 2672,2877 P1.5@2676,2873 2604.42,2877 ; v1@2520.44,2870.51 2568.5,2877 v1@2520.44,2883.49 ; P1.5@2668.36,2844.58 2604.42,2877 ; P1.5@2671.58,2902.1 2604.42,2877 ; P1.5@2672.92,2855.84 2604.42,2877 ; P1.5@2674.85,2890.39 2604.42,2877
RXD: R4.2 U1.9 | length 2781.4
  Top Layer w12: U1.9@1522,3295 1593,3295 ; U1.9@1564,3295 1593,3295 ; v1@1615.03,3326.19 1593,3295 ; v1@1624.19,3317.03 1593,3295 ; R4.2@2339.11,2082.75 2353,2137 R4.2@2366.89,2082.75 ; v1@2346.51,2218.56 2353,2170.5 ; R4.2@2353,2081 v1(2353,2219) 2353,2170.5 ; v1@2359.49,2218.56 2353,2170.5 ; 1593,3295 v1(1620,3322) 1593,3295
  Bottom Layer w12: v1@1613.51,3321.56 1620,3273.5 ; v1@1626.49,3321.56 1620,3273.5 ; v1@2348.69,2223.87 2390.96,2256.96 v1@2357.87,2214.69 ; v1(2353,2219) 2393,2259 2393,3233 1641,3233 1620,3254 v1(1620,3322) 1620,3273.5
SCK: P1.7 U1.3 | length 2421.9
  Top Layer w12: U1.3@1522,3107 1612,3107 1612,3106 1629,3089 1629,2740 1666,2703 2519,2703 2549,2733 v1(2549,2966.75) 2549,2918.25 ; U1.3@1564,3107 1608,3107 ; v1@2542.51,2966.31 2549,2918.25 ; v1@2555.49,2966.31 2549,2918.25
  Bottom Layer w12: v1(2549,2966.75) 2669.75,2966.75 P1.7@2676,2973 2604.22,2966.75 ; v1@2549.44,2960.26 2597.5,2966.75 v1@2549.44,2973.23 ; P1.7@2667.51,3001.18 2604.22,2966.75 ; P1.7@2672.4,2990.06 2604.22,2966.75 ; P1.7@2672.51,2943.77 2604.22,2966.75 ; P1.7@2675.4,2955.58 2604.22,2966.75
TXD: R6.2 U1.10 | length 2924.5
  Top Layer w12: U1.10@1522,3327 1577,3327 ; v1@1612.13,3371.31 1579.04,3329.04 ; v1@1621.31,3362.13 1579.04,3329.04 ; R6.2@2425.11,2080.75 2439,2135 R6.2@2452.89,2080.75 ; v1@2432.51,2213.56 2439,2165.5 ; R6.2@2439,2079 v1(2439,2214) 2439,2165.5 ; v1@2445.49,2213.56 2439,2165.5 ; 1577,3327 1564,3327 1577,3327 ; 1577,3327 v1(1617,3367) 1579.04,3329.04
  Bottom Layer w12: v1@1614.38,3361.05 1652,3348 ; v1@1620.56,3372.44 1652,3348 ; v1@2432.51,2214.44 2439,2262.5 v1@2445.49,2214.44 ; v1(2439,2214) 2439,3231 2411,3259 1670,3259 1652,3277 1652,3348 ; v1(1617,3367) 1633,3367 ; v1(1617,3367) 1652,3348 ; v1(1617,3367) 1633,3367 ; 1633,3367 1618.32,3360.64 1633,3367 ; 1633,3367 1618.32,3373.36 1633,3367 ; 1633,3367 1652,3348